# EAGLE board Eagle_LEDCUBE (EAGLE 7.2.0)
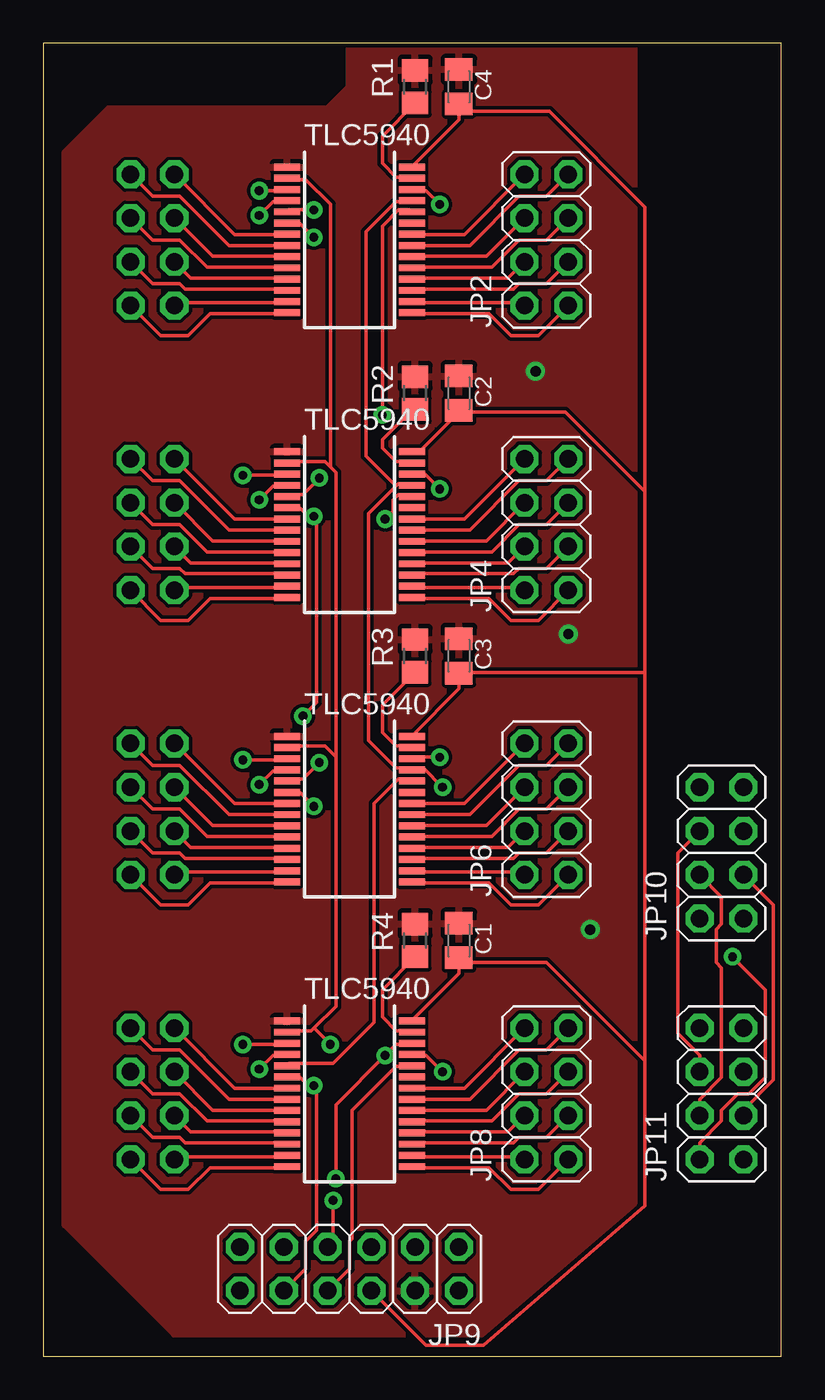
[diagram p0: board, top side]
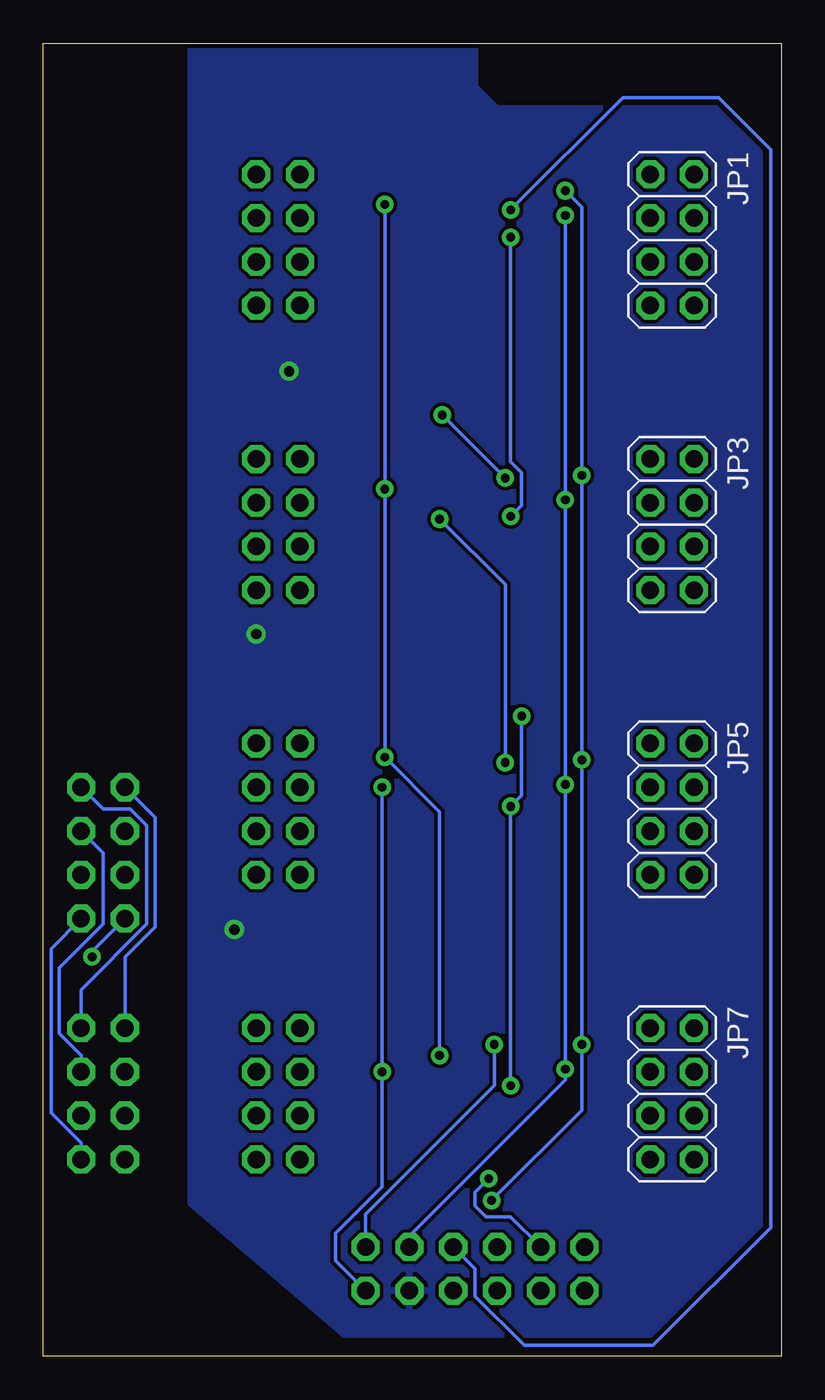
[diagram p1: board, bottom side, seen from below]

Size 42.85 x 76.19 mm. Coordinates in mm from the lower left corner, seen from the top.
Outline: 0,0 42.85,0 42.85,76.19 0,76.19 0,0
Copper layers (1*16): Top 0.035mm / dielectric 1.5mm / Bottom 0.035mm
Design rules "8mils": minimum track width 8mil, minimum drill 20mil, track to track 8mil, track to pad 8mil, pad to pad 8mil, via to via 8mil, smd to smd 8mil, copper to edge 10mil, drill to drill 8mil, minimum pad ring 12mil, minimum via ring 10mil, stop-mask expansion 4mil, vias tented up to drill 25mil, thermal gap 10mil

## Footprints (pad centres in the part's own frame; a part is rotated, then mirrored left to right if it is on the bottom)
C0805K = smd 1.3 x 1.6: 1 -1,0; 2 1,0
IC-SSOP28 = smd 0.4 x 1.5: 1 -4.225,-3.625; 2 -3.575,-3.625; 3 -2.925,-3.625; 4 -2.275,-3.625; 5 -1.625,-3.625; 6 -0.975,-3.625; 7 -0.325,-3.625; 8 0.325,-3.625; 9 0.975,-3.625; 10 1.625,-3.625; 11 2.275,-3.625; 12 2.925,-3.625; 13 3.575,-3.625; 14 4.225,-3.625; 15 4.225,3.625; 16 3.575,3.625; 17 2.925,3.625; 18 2.275,3.625; 19 1.625,3.625; 20 0.975,3.625; 21 0.325,3.625; 22 -0.325,3.625; 23 -0.975,3.625; 24 -1.625,3.625; 25 -2.275,3.625; 26 -2.925,3.625; 27 -3.575,3.625; 28 -4.225,3.625
2X04 = drill 1.016 octagon: 1 -3.81,-1.27; 2 -3.81,1.27; 3 -1.27,-1.27; 4 -1.27,1.27; 5 1.27,-1.27; 6 1.27,1.27; 7 3.81,-1.27; 8 3.81,1.27
2X06 = drill 1.016 octagon: 1 -6.35,-1.27; 2 -6.35,1.27; 3 -3.81,-1.27; 4 -3.81,1.27; 5 -1.27,-1.27; 6 -1.27,1.27; 7 1.27,-1.27; 8 1.27,1.27; 9 3.81,-1.27; 10 3.81,1.27; 11 6.35,-1.27; 12 6.35,1.27
R0805 = smd 1.3 x 1.5: 1 -0.95,0; 2 0.95,0

## Placement (x,y rotation side)
C1  [C0805K]  24.13,24.13 270 top
C2  [C0805K]  24.13,55.88 270 top
C3  [C0805K]  24.13,40.64 270 top
C4  [C0805K]  24.13,73.66 270 top
IC1  [IC-SSOP28]  17.78,64.77 270 top
IC2  [IC-SSOP28]  17.78,48.26 270 top
IC3  [IC-SSOP28]  17.78,31.75 270 top
IC4  [IC-SSOP28]  17.78,15.24 270 top
JP1  [2X04]  6.35,64.77 270 bottom
JP2  [2X04]  29.21,64.77 90 top
JP3  [2X04]  6.35,48.26 270 bottom
JP4  [2X04]  29.21,48.26 90 top
JP5  [2X04]  6.35,31.75 270 bottom
JP6  [2X04]  29.21,31.75 90 top
JP7  [2X04]  6.35,15.24 270 bottom
JP8  [2X04]  29.21,15.24 90 top
JP9  [2X06]  17.78,5.08 180 top
JP10  [2X04]  39.37,29.21 90 top
JP11  [2X04]  39.37,15.24 90 top
R1  2.2k  [R0805]  21.59,73.66 90 top
R2  2.2k  [R0805]  21.59,55.88 90 top
R3  2.2k  [R0805]  21.59,40.64 90 top
R4  2.2k  [R0805]  21.59,24.13 90 top

## Library data of the parts
C1-C4 R1-R4 = resistor
IC1-IC4 = TLC5940
JP1-JP11 = pinhead

## Nets
A1: IC1.7 JP1.1
A2: IC1.8 JP1.2
A3: IC1.9 JP1.3
A4: IC1.10 JP1.4
A5: IC1.11 JP1.5
A6: IC1.12 JP1.6
A7: IC1.13 JP1.7
A8: IC1.14 JP1.8
A9: IC1.15 JP2.1
A10: IC1.16 JP2.2
A11: IC1.17 JP2.3
A12: IC1.18 JP2.4
A13: IC1.19 JP2.5
A14: IC1.20 JP2.6
A15: IC1.21 JP2.7
A16: IC1.22 JP2.8
B1: IC2.7 JP3.1
B2: IC2.8 JP3.2
B3: IC2.9 JP3.3
B4: IC2.10 JP3.4
B5: IC2.11 JP3.5
B6: IC2.12 JP3.6
B7: IC2.13 JP3.7
B8: IC2.14 JP3.8
B9: IC2.15 JP4.1
B10: IC2.16 JP4.2
B11: IC2.17 JP4.3
B12: IC2.18 JP4.4
B13: IC2.19 JP4.5
B14: IC2.20 JP4.6
B15: IC2.21 JP4.7
B16: IC2.22 JP4.8
BLANK: IC1.2 IC2.2 IC3.2 IC4.2 JP9.1
C1: IC3.7 JP5.1
C2: IC3.8 JP5.2
C3: IC3.9 JP5.3
C4: IC3.10 JP5.4
C5: IC3.11 JP5.5
C6: IC3.12 JP5.6
C7: IC3.13 JP5.7
C8: IC3.14 JP5.8
C9: IC3.15 JP6.1
C10: IC3.16 JP6.2
C11: IC3.17 JP6.3
C12: IC3.18 JP6.4
C13: IC3.19 JP6.5
C14: IC3.20 JP6.6
C15: IC3.21 JP6.7
C16: IC3.22 JP6.8
D1: IC4.7 JP7.1
D2: IC4.8 JP7.2
D3: IC4.9 JP7.3
D4: IC4.10 JP7.4
D5: IC4.11 JP7.5
D6: IC4.12 JP7.6
D7: IC4.13 JP7.7
D8: IC4.14 JP7.8
D9: IC4.15 JP8.1
D10: IC4.16 JP8.2
D11: IC4.17 JP8.3
D12: IC4.18 JP8.4
D13: IC4.19 JP8.5
D14: IC4.20 JP8.6
D15: IC4.21 JP8.7
D16: IC4.22 JP8.8
DCPRG: IC1.26 IC2.26 IC3.26 IC4.26 JP9.9
GND: C1.1 C2.1 C3.1 C4.1 IC1.1 IC2.1 IC3.1 IC4.1 JP9.4 R1.2 R2.2 R3.2 R4.2
GSCLK: IC1.25 IC2.25 IC3.25 IC4.25 JP9.2
L1: JP10.1 JP11.1
L2: JP10.2 JP11.2
L3: JP10.3 JP11.3
L4: JP10.4 JP11.4
L5: JP10.5 JP11.5
L6: JP10.6 JP11.6
L7: JP10.7 JP11.7
L8: JP10.8 JP11.8
N$5: IC1.27 R1.1
N$16: IC2.27 R2.1
N$26: IC3.27 R3.1
N$35: IC4.27 R4.1
SCLK: IC1.4 IC2.4 IC3.4 IC4.4 JP9.3
SIN: IC1.5 JP9.5
SIN_B: IC1.24 IC2.5
SIN_C: IC2.24 IC3.5
SIN_D: IC3.24 IC4.5
SIN_E: IC4.24 JP9.8
VCC: C1.2 C2.2 C3.2 C4.2 IC1.28 IC2.28 IC3.28 IC4.28 JP9.6
VPRG: IC1.6 IC2.6 IC3.6 IC4.6 JP9.10
XLAT: IC1.3 IC2.3 IC3.3 IC4.3 JP9.7

## Tracks (layer width: path | path; a pad name or v marks a point on that pad's centre or on a via)
A1
  Top 0.203: JP1.1 11.11,65.09 14.13,65.09 IC1.7
A2
  Top 0.203: JP1.2 6.35,67.31 7.94,67.31 10.79,64.45 14.13,64.45 IC1.8
A3
  Top 0.203: JP1.3 9.84,63.82 14.13,63.82 IC1.9
A4
  Top 0.203: JP1.4 6.35,64.77 7.94,64.77 9.52,63.18 14.13,63.18 IC1.10
A5
  Top 0.203: JP1.5 8.57,62.55 14.13,62.55 IC1.11
A6
  Top 0.203: JP1.6 6.35,62.23 7.94,62.23 8.25,61.91 14.13,61.91 IC1.12
A7
  Top 0.203: JP1.7 7.78,61.12 14.13,61.12 IC1.13
A8
  Top 0.203: JP1.8 6.83,59.21 8.41,59.21 9.68,60.48 14.13,60.48 IC1.14
A9
  Top 0.203: JP2.1 28.73,59.21 27.15,59.21 25.88,60.48 21.43,60.48 IC1.15
A10
  Top 0.203: JP2.2 27.78,61.12 21.43,61.12 IC1.16
A11
  Top 0.203: JP2.3 29.21,62.23 27.62,62.23 27.31,61.91 21.43,61.91 IC1.17
A12
  Top 0.203: JP2.4 26.99,62.55 21.43,62.55 IC1.18
A13
  Top 0.203: JP2.5 29.21,64.77 27.62,64.77 26.04,63.18 21.43,63.18 IC1.19
A14
  Top 0.203: JP2.6 25.72,63.82 21.43,63.82 IC1.20
A15
  Top 0.203: JP2.7 29.21,67.31 27.62,67.31 24.76,64.45 21.43,64.45 IC1.21
A16
  Top 0.203: JP2.8 24.45,65.09 21.43,65.09 IC1.22
B1
  Top 0.203: JP3.1 11.11,48.58 14.13,48.58 IC2.7
B2
  Top 0.203: JP3.2 6.35,50.8 7.94,50.8 10.79,47.94 14.13,47.94 IC2.8
B3
  Top 0.203: JP3.3 9.84,47.31 14.13,47.31 IC2.9
B4
  Top 0.203: JP3.4 6.35,48.26 7.94,48.26 9.52,46.67 14.13,46.67 IC2.10
B5
  Top 0.203: JP3.5 8.57,46.04 14.13,46.04 IC2.11
B6
  Top 0.203: JP3.6 6.35,45.72 7.94,45.72 8.25,45.4 14.13,45.4 IC2.12
B7
  Top 0.203: JP3.7 7.78,44.61 14.13,44.61 IC2.13
B8
  Top 0.203: JP3.8 6.83,42.7 8.41,42.7 9.68,43.97 14.13,43.97 IC2.14
B9
  Top 0.203: JP4.1 28.73,42.7 27.15,42.7 25.88,43.97 21.43,43.97 IC2.15
B10
  Top 0.203: JP4.2 27.78,44.61 21.43,44.61 IC2.16
B11
  Top 0.203: JP4.3 29.21,45.72 27.62,45.72 27.31,45.4 21.43,45.4 IC2.17
B12
  Top 0.203: JP4.4 26.99,46.04 21.43,46.04 IC2.18
B13
  Top 0.203: JP4.5 29.21,48.26 27.62,48.26 26.04,46.67 21.43,46.67 IC2.19
B14
  Top 0.203: JP4.6 25.72,47.31 21.43,47.31 IC2.20
B15
  Top 0.203: JP4.7 29.21,50.8 27.62,50.8 24.76,47.94 21.43,47.94 IC2.21
B16
  Top 0.203: JP4.8 24.45,48.58 21.43,48.58 IC2.22
BLANK  (via drill 0.51)
  Top 0.203: 15.72,19.05 16.99,20.32 16.99,34.77 | 15.72,19.05 15.56,18.89 14.29,18.89 IC4.2 | 16.99,34.77 16.35,35.4 14.29,35.4 IC3.2 | 16.67,51.59 16.99,51.28 16.99,34.77 | 16.67,51.59 16.35,51.91 14.29,51.91 IC2.2 | 16.67,51.59 16.67,66.83 15.24,68.26 14.29,68.26 IC1.2 | 15.72,19.05 v16.67,18.1
  Bottom 0.203: JP9.1 24.13,8.26 16.67,15.72 v16.67,18.1
C1
  Top 0.203: JP5.1 11.11,32.07 14.13,32.07 IC3.7
C2
  Top 0.203: JP5.2 6.35,34.29 7.94,34.29 10.79,31.43 14.13,31.43 IC3.8
C3
  Top 0.203: JP5.3 9.84,30.8 14.13,30.8 IC3.9
C4
  Top 0.203: JP5.4 6.35,31.75 7.94,31.75 9.52,30.16 14.13,30.16 IC3.10
C5
  Top 0.203: JP5.5 8.57,29.53 14.13,29.53 IC3.11
C6
  Top 0.203: JP5.6 6.35,29.21 7.94,29.21 8.25,28.89 14.13,28.89 IC3.12
C7
  Top 0.203: JP5.7 7.78,28.1 14.13,28.1 IC3.13
C8
  Top 0.203: JP5.8 6.83,26.19 8.41,26.19 9.68,27.46 14.13,27.46 IC3.14
C9
  Top 0.203: JP6.1 28.73,26.19 27.15,26.19 25.88,27.46 21.43,27.46 IC3.15
C10
  Top 0.203: JP6.2 27.78,28.1 21.43,28.1 IC3.16
C11
  Top 0.203: JP6.3 29.21,29.21 27.62,29.21 27.31,28.89 21.43,28.89 IC3.17
C12
  Top 0.203: JP6.4 26.99,29.53 21.43,29.53 IC3.18
C13
  Top 0.203: JP6.5 29.21,31.75 27.62,31.75 26.04,30.16 21.43,30.16 IC3.19
C14
  Top 0.203: JP6.6 25.72,30.8 21.43,30.8 IC3.20
C15
  Top 0.203: JP6.7 29.21,34.29 27.62,34.29 24.76,31.43 21.43,31.43 IC3.21
C16
  Top 0.203: JP6.8 24.45,32.07 21.43,32.07 IC3.22
D1
  Top 0.203: JP7.1 11.11,15.56 14.13,15.56 IC4.7
D2
  Top 0.203: JP7.2 6.35,17.78 7.94,17.78 10.79,14.92 14.13,14.92 IC4.8
D3
  Top 0.203: JP7.3 9.84,14.29 14.13,14.29 IC4.9
D4
  Top 0.203: JP7.4 6.35,15.24 7.94,15.24 9.52,13.65 14.13,13.65 IC4.10
D5
  Top 0.203: JP7.5 8.57,13.02 14.13,13.02 IC4.11
D6
  Top 0.203: JP7.6 6.35,12.7 7.94,12.7 8.25,12.38 14.13,12.38 IC4.12
D7
  Top 0.203: JP7.7 7.78,11.59 14.13,11.59 IC4.13
D8
  Top 0.203: JP7.8 6.83,9.68 8.41,9.68 9.68,10.95 14.13,10.95 IC4.14
D9
  Top 0.203: JP8.1 28.73,9.68 27.15,9.68 25.88,10.95 21.43,10.95 IC4.15
D10
  Top 0.203: JP8.2 27.78,11.59 21.43,11.59 IC4.16
D11
  Top 0.203: JP8.3 29.21,12.7 27.62,12.7 27.31,12.38 21.43,12.38 IC4.17
D12
  Top 0.203: JP8.4 26.99,13.02 21.43,13.02 IC4.18
D13
  Top 0.203: JP8.5 29.21,15.24 27.62,15.24 26.04,13.65 21.43,13.65 IC4.19
D14
  Top 0.203: JP8.6 25.72,14.29 21.43,14.29 IC4.20
D15
  Top 0.203: JP8.7 29.21,17.78 27.62,17.78 24.76,14.92 21.43,14.92 IC4.21
D16
  Top 0.203: JP8.8 24.45,15.56 21.43,15.56 IC4.22
DCPRG  (via drill 0.51)
  Top 0.203: v16.99,10.32 16.99,14.61 v19.84,17.46 20.48,18.1 21.27,18.1 IC4.26 | v23.02,34.77 21.43,34.77 IC3.26 | v23.02,50.32 22.07,51.28 21.43,51.28 IC2.26 | v23.02,66.83 22.22,67.63 21.43,67.63 IC1.26
  Bottom 0.203: v16.99,10.32 17.78,9.53 17.78,8.73 17.14,8.1 15.72,8.1 JP9.9 | v23.02,66.83 v23.02,50.32 v23.02,34.77 19.84,31.59 v19.84,17.46
GND  (via drill 0.6)
  other vias: 28.57,57.15 30.48,41.91 31.75,24.77
  pour Bottom: 1.27,7.62 1.27,69.85 3.81,72.39 16.51,72.39 17.78,73.66 17.78,76.2 34.29,76.2 34.29,8.89 25.4,1.27 7.62,1.27
  pour Top: 1.27,7.62 1.27,69.85 3.81,72.39 16.51,72.39 17.78,73.66 17.78,76.2 34.29,76.2 34.29,8.89 25.4,1.27 7.62,1.27
GSCLK  (via drill 0.51)
  Top 0.203: v23.18,16.51 22.22,17.46 21.43,17.46 IC4.25 | 20.48,50.48 20.64,50.64 21.27,50.64 IC2.25 | 20.48,50.48 18.89,48.9 18.89,35.72 20.48,34.13 21.27,34.13 IC3.25 21.43,34.13 22.07,34.13 v23.18,33.02 | 20.48,50.48 18.73,52.23 18.73,65.25 20.48,66.99 21.27,66.99 IC1.25
  Bottom 0.203: JP9.2 25.88,5.56 25.88,7.14 23.18,9.84 v23.18,16.51 v23.18,33.02
L1
  Bottom 0.203: JP11.1 40.64,12.38 42.39,14.13 42.39,23.65 JP10.1
L2  (via drill 0.51)
  Top 0.203: JP11.2 38.1,12.38 39.37,13.65 39.37,14.29 40.32,15.24 40.96,15.24 41.91,16.19 41.91,21.27 v40,23.18
  Bottom 0.203: v40,23.18 40,23.5 JP10.2
L3
  Top 0.203: JP11.3 40.64,14.29 42.39,16.03 42.39,26.19 JP10.3
L4
  Top 0.203: JP11.4 38.1,14.92 39.37,16.19 39.37,22.54 39.05,22.86 39.05,24.77 39.37,25.08 39.37,26.67 JP10.4
L5
  Bottom 0.203: JP11.5 40.64,17.46 41.91,18.73 41.91,22.54 39.37,25.08 39.37,29.21 JP10.5
L6
  Top 0.203: JP11.6 38.1,17.46 36.83,18.73 36.83,29.21 JP10.6
L7
  Bottom 0.203: JP11.7 40.64,21.27 36.83,25.08 36.83,30.8 37.78,31.75 39.37,31.75 JP10.7
L8
  Bottom 0.203: JP11.8 38.1,23.18 36.35,24.92 36.35,31.27 JP10.8
N$5
  Top 0.203: IC1.27 21.27,68.42 20.48,68.42 19.68,69.22 19.68,70.8 R1.1
N$16
  Top 0.203: IC2.27 21.27,51.91 20.48,51.91 19.68,52.7 19.68,53.18 21.59,55.09 R2.1
N$26
  Top 0.203: IC3.27 21.27,35.4 20.48,35.4 19.68,36.2 19.68,37.78 R3.1
N$35
  Top 0.203: IC4.27 21.27,18.89 20.48,18.89 19.68,19.68 19.68,21.27 R4.1
SCLK  (via drill 0.51)
  Top 0.203: v12.54,16.67 13.34,17.46 14.13,17.46 IC4.4 | v12.54,33.18 13.34,33.97 14.13,33.97 IC3.4 | v12.54,49.69 13.34,50.48 14.13,50.48 IC2.4 | v12.54,66.2 13.34,66.99 14.13,66.99 IC1.4
  Bottom 0.203: JP9.3 21.59,6.99 12.54,16.03 v12.54,16.67 v12.54,33.18 v12.54,49.69 v12.54,66.2
SIN  (via drill 0.51)
  Top 0.203: v15.72,66.52 14.29,66.52 IC1.5
  Bottom 0.203: v15.72,66.52 9.21,73.03 3.65,73.03 0.63,70.01 0.63,7.46 7.46,0.64 14.92,0.64 17.78,3.49 17.78,5.08 JP9.5
SIN_B  (via drill 0.51)
  Top 0.203: v16.03,50.96 15.08,50.01 14.29,50.01 IC2.5 | v19.68,54.61 19.68,65.56 20.64,66.52 21.27,66.52 IC1.24
  Bottom 0.203: v19.68,54.61 v16.03,50.96
SIN_C  (via drill 0.51)
  Top 0.203: v16.03,34.45 15.08,33.5 14.29,33.5 IC3.5 | v19.84,48.58 20.32,49.05 20.32,49.69 20.64,50.01 21.27,50.01 IC2.24
  Bottom 0.203: v16.03,34.45 16.03,44.77 v19.84,48.58
SIN_D
  Top 0.203: IC4.5 14.29,16.99 16.83,16.99 19.21,19.37 19.21,32.07 20.64,33.5 21.27,33.5 IC3.24
SIN_E
  Top 0.203: JP9.8 17.78,5.08 17.78,6.67 17.94,6.83 17.94,14.29 20.48,16.83 21.27,16.83 IC4.24
VCC
  Top 0.203: 24.13,72.23 C4.2 24.13,72.55 | 24.13,72.23 24.13,71.75 21.43,69.06 IC1.28 | IC3.28 21.43,36.04 24.13,38.73 C3.2 24.13,39.69 34.92,39.69 | 24.13,54.77 21.91,52.55 21.43,52.55 IC2.28 | 24.13,22.86 C1.2 24.13,23.02 | 24.13,22.86 24.13,22.23 21.43,19.53 IC4.28 | JP9.6 22.22,0.64 25.56,0.64 34.92,8.73 34.92,17.14 | 34.92,17.14 29.21,22.86 24.13,22.86 | 24.13,54.77 30.32,54.77 34.92,50.16 | 34.92,17.14 34.92,39.69 | 34.92,39.69 34.92,50.16 | 24.13,54.77 C2.2 | 24.13,72.23 29.37,72.23 34.92,66.67 34.92,50.16
VPRG  (via drill 0.51)
  Top 0.203: 15.56,15.56 15.88,15.24 15.88,7.3 15.24,6.67 15.24,5.08 JP9.10 | 15.56,15.56 14.92,16.19 14.29,16.19 IC4.6 | v15.72,31.91 14.92,32.7 14.29,32.7 IC3.6 | 15.56,15.56 v15.72,15.72 | 15.56,48.58 15.88,48.26 15.88,37.94 v15.08,37.15 | 15.56,48.58 14.92,49.21 14.29,49.21 IC2.6 | v15.72,64.93 14.92,65.72 14.29,65.72 IC1.6 | 15.56,48.58 v15.72,48.74
  Bottom 0.203: v15.72,15.72 v15.72,31.91 15.08,32.54 v15.08,37.15 | v15.72,64.93 15.72,51.91 15.08,51.28 15.08,49.37 v15.72,48.74
XLAT  (via drill 0.51)
  Top 0.203: v11.59,18.1 14.13,18.1 IC4.3 | v16.83,9.05 16.83,6.67 JP9.7 | v11.59,34.61 14.13,34.61 IC3.3 | v11.59,51.12 14.13,51.12 IC2.3 | v12.54,67.63 14.13,67.63 IC1.3
  Bottom 0.203: v16.83,9.05 11.59,14.29 v11.59,18.1 v11.59,34.61 v11.59,51.12 11.59,66.67 v12.54,67.63